# Altium PCB Co1n1oT.PcbDoc (part 3 of 3)
Units mil, origin at the board's own origin, x right, y up, seen from the top; angles counter-clockwise.
Board outline 3740.16 x 2559.06 mil, 4 copper layers (Top Layer, GroundPlane, PowerPlane, Bottom Layer), stack 58.4 mil thick; 129 components, 105 nets, 410 pads, 365 vias.
Unrouted connection lines stored in the file: 18.
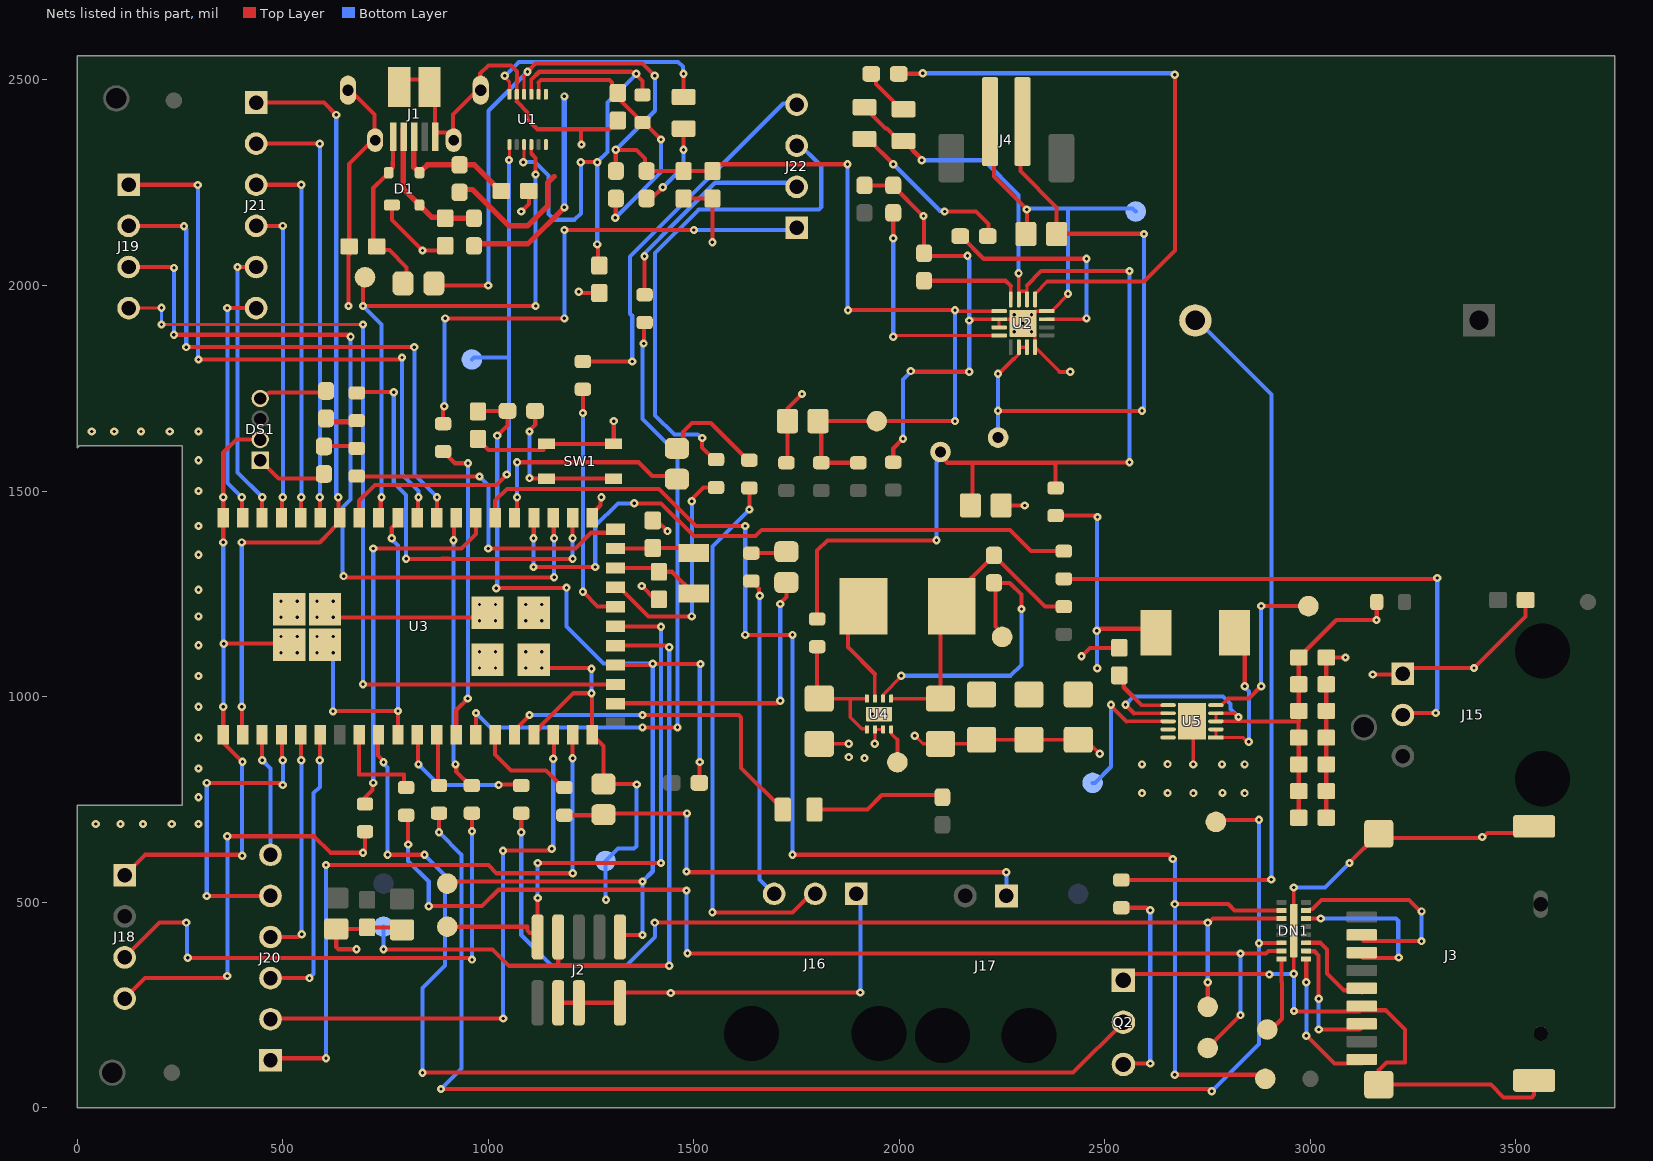
[diagram p4: the nets of this part, all layers, seen from the top]

## Via types
v1: diameter 20, hole 8, Top Layer to Bottom Layer, 350 vias
v2: diameter 19.68, hole 7.87, Top Layer to Bottom Layer, 13 vias
v3: diameter 20, hole 8, Top Layer to Bottom Layer, tented both sides, 2 vias

## Nets (pads, with @x,y where several pads share a name; then routed paths per layer and width w, separated by ;. In a path a pad name is that pad's centre, name@x,y a point inside that pad or via, vN(x,y) a via of type N, cw(c..) or ccw(c..) an arc to the next point about the centre after c; other vN are vias at no path point) (continued)
BQ_ILIM_6: R20.2 U2.12 | length 249.2
  Top Layer w8: U2.12@2270.94,1965.99 2270.94,1999.06
  Top Layer w10: R20.2@2060,2011.54 2258.46,2011.54 2270.94,1999.06
BQ_ISET_6: R21.1 U2.16 | length 560.4
  Top Layer w8: v1@1991.09,1878.47 U2.16@2242.48,1878.47
  Top Layer w10: v1(1985,1875) 1987.62,1875 v1@1991.09,1878.47 ; v1(1985,2115) R21.1@1985,2176.54
  Bottom Layer w10: v1(1985,1875) v1(1985,2115)
"BUZZER PWM-": Q2.2 U3.9 | length 2721.7
  Top Layer w10: U3.9@732.95,907.44 731.48,905.96 731.48,856.23 745,842.71 v1(745,840) ; v1(755,615) v1(844.53,615) ; v1(840,85) 2422.64,85 Q2.2@2545,207.36
  Bottom Layer w10: v1(745,840) 745,837.29 755,827.29 v1(755,615) ; v1(840,85) 840,290.73 895,345.73 895,564.37 844.53,614.84 v1(844.53,615)
CBUS0_5: D5.K U1.6 | length 576.4
  Top Layer w8: v1(1040,2510) 1040,2506.75 1051.34,2495.41 U1.6@1051.34,2465.08
  Top Layer w10: D5.K@1475,2458.59 v1(1475,2515)
  Bottom Layer w10: v1(1040,2510) 1074.06,2544.06 1461.63,2544.06 1473.09,2532.6 1473.09,2516.91 v1(1475,2515)
F1_3: J21.6 U3.50 | length 595.4
  Top Layer w10: v1(365,1945) J21.6@435,1945 ; v1(400,1485) 401.12,1483.88 401.12,1436.12 U3.50@402.24,1435
  Bottom Layer w10: v1(365,1945) 365,1520 v1(400,1485)
F2_3: J21.5 U3.49 | length 680.1
  Top Layer w10: v1(390,2045) J21.5@435,2045 ; U3.49@449.49,1435 449.74,1435.26 449.74,1484.74 v1(450,1485)
  Bottom Layer w10: v1(390,2045) 390,1545 v1(450,1485)
F3_3: J21.4 U3.48 | length 777.2
  Top Layer w10: J21.4@435,2145 v1(500,2145) ; U3.48@496.73,1435 498.37,1436.63 498.37,1483.37 v1(500,1485)
  Bottom Layer w10: v1(500,1485) 500,1614.14 ; 500,1613.31 v1(500,2145)
F4_3: J21.3 U3.47 | length 920.4
  Top Layer w10: J21.3@435,2245 v1(545,2245) ; U3.47@543.98,1435 544.49,1435.51 544.49,1484.49 v1(545,1485)
  Bottom Layer w10: v1(545,1485) v1(545,2245)
F5_3: J21.2 U3.46 | length 1065.5
  Top Layer w10: J21.2@435,2345 v1(590,2345) ; v1(590,1485) 590.61,1484.39 590.61,1435.61 U3.46@591.22,1435
  Bottom Layer w10: v1(590,1485) v1(590,2345)
F6_3: J21.1 U3.2 U3.45 | length 1928
  Top Layer w10: v1(400,975) 401.12,973.88 401.12,908.56 U3.2@402.24,907.44 ; v1(400,1375) 589.84,1375 620,1405.16 620,1406.69 638.46,1425.16 U3.45@638.46,1435 ; J21.1@435,2445 600,2445 v1(630,2415) ; U3.45@635,1435 v1(635,1485)
  Bottom Layer w10: v1(400,975) v1(400,1375) ; v1(630,2415) 630,1492.62 635,1487.62 v1(635,1485)
FF1_3: J20.6 U3.3 | length 301.7
  Top Layer w10: U3.3@449.49,907.44 449.74,907.18 449.74,845.26 v1(450,845)
  Bottom Layer w10: v1@449.47,844.47 v1(450,845) 470,825 J20.6@470,615
FF2_3: J20.5 U3.4 | length 740.9
  Top Layer w10: v1(315,515) J20.5@470,515 ; v1(315,790) 492.29,790 497.29,785 v1(500,785) ; U3.4@496.73,907.44 498.37,905.81 498.37,846.63 v1(500,845)
  Bottom Layer w10: v1(315,515) v1(315,790) ; v1(500,785) v1(500,845)
FF3_3: J20.4 U3.5 | length 565.3
  Top Layer w10: J20.4@470,415 536.49,415 543.35,421.86 v1(546.06,421.86) ; U3.5@543.98,907.44 544.49,906.93 544.49,845.51 v1(545,845)
  Bottom Layer w10: v1(545,845) 545,422.92 v1(546.06,421.86)
FF4_3: J20.3 U3.6 | length 688.8
  Top Layer w10: J20.3@470,315 v1(565,315) ; v1(590,845) 590.61,845.61 U3.6@590.61,898.21
  Bottom Layer w10: v1(565,315) 565,315.7 575,325.7 575,765 590,780 v1(590,845)
FF5_3: J20.2 U3.18 | length 1376.2
  Top Layer w10: J20.2@470,215 471.88,216.88 v1(1036.36,216.88) ; v1(1035.68,625) 1147.04,625 1151.86,629.82 v1(1154.48,629.82) ; U3.18@1158.15,907.44 1160,905.59 v1@1160,848.55
  Bottom Layer w10: v1(1035.68,625) 1035.68,217.56 v1(1036.36,216.88) ; v1(1154.48,629.82) 1157.93,633.26 v1(1157.93,848.55)
FF6_3: J20.1 U3.19 | length 1553.1
  Top Layer w10: J20.1@470,115 475,120 v1(605,120) ; v1(605,590) 1000,590 1020,570 v1(1205.12,570) ; v1(1205,850) 1205.2,850.2 1205.2,907.24 U3.19@1205.39,907.44
  Bottom Layer w10: v1(605,120) v1(605,590) ; v1@1205,570 v1(1205,850)
FLASH_MEM_SPI_C\S\: DN1.10 TP16.1 U3.37 | length 3560.3
  Top Layer w10: U3.37@1016.42,1435 1016.42,1476.42 1045,1505 1415,1505 1505,1415 v1(1625,1415) ; v1(1625,1150) v1(1740,1150) ; v1(1740,615) 2654.3,615 2664.3,605 v1(2665,605) ; v1(2670,80) 2880,80 TP16.1@2890,70 ; v1(2670,495) 2800,495 2815.32,479.69 DN1.10@2929.53,479.69
  Bottom Layer w10: v1(1625,1150) v1(1625,1415) ; v1(1740,615) v1(1740,1150) ; v1(2665,605) 2665,602.38 2670,597.38 v1(2670,495) v1(2670,80)
GND: C1.1 C2.1 C3.1 C4.1 C5.1 C6.1 C7.1 C8.1 C9.1 C10.1 C11.2 C12.1 C13.1 C14.1 C15.1 C16.1 C17.1 C18.1 C19.1 C20.1 C21.1 C22.1 C23.1 C24.1 C25.1 C26.1 C27.1 C28.1 C29.1 C31.1 D1.1 DN1.EP DS1.2 J1.5 J1.S1 J1.S2 J1.S3 J1.S4 J1.S5 J1.S6 J2.3 J2.5 J2.9 J3.6 J3.10 J3.11 J3.12 J3.13 J4.2 J15.1 J16.1 J18.1 JP10.1 JP11.2 Q2.1 R6.1 R15.2 R20.1 R21.2 SW1.1 SW1.2 TP3.1 TP7.1 U1.5 U1.13 U2.4 U2.8 U2.14 U2.15 U2.EP U3.1 U3.10 U3.17 U3.20 U3.32 U3.42 U3.51 U3.EP U4.2 U4.3 U4.9 U5.11 | length 13938.3
  Top Layer w8: 1069.21,2447.2 U1.5@1069.21,2464.88 ; U1.5@1069.21,2465.08 1069.21,2496.15 ; C8.1@1805,884.88 v1(1876.72,884.92) ; v1(1940,885) 1940.63,885.63 U4.2@1940.63,920 U4.3@1960.32,920 ; v1(2037.38,904.88) 2057.37,884.88 C9.1@2100,884.88 2190,884.88 C16.1@2200,894.88 C17.1@2315,894.88 C18.1@2435,894.88 2453.29,894.88 v1(2487.59,860.59) ; 2179.97,1918.13 U2.14@2228.46,1918.13 ; U2.15@2242.48,1898.15 U2.14@2242.48,1917.55 ; U2.14@2256.49,1917.86 U2.EP@2272.72,1917.86 ; v1(2300.47,1907.99) v1(2321.31,1887.16) 2330,1878.47 U2.4@2330,1850 2390.06,1789.94 ; U2.EP@2330,1937.52 U2.8@2358.47,1937.52 U2.8@2344.74,1937.52 ; U2.8@2372.48,1940.17 v1@2410,1977.68 ; U5.11@2711.81,939.68 2715,936.49 v1(2715,835) ; v1(1876.72,884.92) v1(1876.72,884.92)
  Top Layer w10: J18.1@115.28,565.28 165,615 398.76,615 v1(401.1,612.66) ; v1(355,975) U3.1@355,907.44 355,888.39 v1(402.15,841.23) ; v1(355,1375) U3.51@355,1435 v1(355,1485) 355,1593.05 386.95,1625 DS1.2@445,1625 ; v1(356.33,1128.62) U3.EP@513.25,1128.62 ; v1(622.27,963.88) 622.83,964.44 779.44,964.44 v1(780,965) 780.1,964.9 780.1,907.54 U3.10@780.2,907.44 ; v1(622.43,1192.63) U3.EP@970.16,1192.63 ; J1.S3@657.4,2493.19 657.4,2481.61 723.35,2415.67 723.35,2357.56 661.54,2295.75 C2.1@661.54,2095 661.54,2074.91 660,2073.37 v1(660,1950) ; v2(679.57,385.21) 635.86,385.21 630,391.07 C11.2@630,434.6 701.06,434.6 C15.1@705,438.54 776.06,438.54 C10.1@780,434.6 ; v1(765,1385) 765,1410.52 770.86,1416.38 771.42,1416.38 780.2,1425.16 U3.42@780.2,1435 ; D1.1@765.47,2195.63 765.47,2159.53 v1(840,2085) 883.46,2085 C5.1@895,2096.54 ; J1.S6@781.91,2501.06 855.73,2501.06 870,2486.79 870,2380 878.07,2371.93 914.29,2371.93 914.29,2415.67 980.24,2481.61 980.24,2515.24 1000,2535 1055,2535 1069.84,2520.16 1069.84,2496.78 1069.21,2496.15 ; C12.1@975,1626.54 975,1624.57 989.69,1609.88 990.12,1609.88 1000,1600 1134.09,1600 1134.09,1607.13 SW1.1@1141.61,1614.65 SW1.2@1305,1614.65 1305,1669.87 v1(1304.87,1670) ; 1069.21,2447.2 1095.71,2420.71 U1.13@1095.71,2403.98 1119.69,2380 1225,2380 ; v1(1080,2180) 1098.46,2198.46 C6.1@1098.46,2230 ; U3.17@1110.45,906.99 U3.17@1110.9,907.44 1124.68,921.22 1124.68,925.52 1207.25,1008.08 v1(1251.17,1008.08) 1251.9,1007.35 1251.9,908.17 U3.20@1252.64,907.44 1280,880.08 R15.2@1280,787.4 1359.84,787.4 v1(1361,786.24) ; v1(1130.03,1069.43) 1249.35,1069.43 v1(1251.17,1067.61) ; J2.3@1170,255 J2.5@1220,255 J2.9@1320,255 1320,270.61 1329.39,280 1442.67,280 v1(1444.01,278.66) ; v1(1220,1985) 1222.71,1985 1226.17,1981.54 C1.1@1270,1981.54 ; v1(1226.5,2342.8) 1225,2344.3 1225,2380 ; U3.32@1252.64,1435 1252.64,1444.84 1273.15,1465.35 1273.15,1483.15 v1(1275,1485) ; C7.1@1315,2401.54 1315,2399.57 1300.31,2384.88 1298.35,2384.88 1293.46,2380 1225,2380 ; v1(1373.39,1268.72) 1405.58,1236.54 C13.1@1415,1236.54 ; C14.1@1400,1428.46 1409.61,1428.46 v1(1435.63,1402.44) ; v1@1444.01,280 v1(1905,280) ; C24.1@1475,2211.54 C3.1@1545,2211.54 v1(1545,2105) ; JP10.1@1725,1568.75 1727.6,1571.35 C4.1@1727.6,1670 1727.6,1700.8 v1(1762.84,1736.04) ; v2@1875,855 1876.77,853.23 v2(1876.77,852.55) ; R6.1@1915,2243.46 R21.2@1985,2243.46 1985,2241.46 2057.51,2168.96 v1(2058.52,2168.96) ; JP11.2@1985,1570 1985,1603.46 v1(2008.87,1627.34) ; v1(2027.41,1791.65) 2029.06,1790 v1(2170,1790) ; v1@2060,2166.46 R20.1@2060,2078.46 2066.29,2072.18 v1(2165.78,2072.18) ; v1(2170,1915) 2171.85,1916.85 2178.7,1916.85 2179.97,1918.13 ; J4.2@2220.63,2398.58 2230,2389.21 2230,2265 v1(2310,2185) 2310,2127.4 C26.1@2307.6,2125 ; C25.1@2247.4,1465 C25.1@2252.4,1465 ; C25.1@2252.4,1470 2257.4,1465 v1(2305,1465) ; U2.EP@2272.72,1917.86 2279.64,1910.95 v1(2279.64,1887.16) ; v1(2300.47,1907.99) v1(2321.31,1928.83) U2.EP@2328.22,1935.74 ; v1(2321.31,1887.16) U2.EP@2328.22,1880.24 ; 2390.06,1789.94 v1(2415.45,1789.94) ; v1@2410,1977.68 v1(2410,1980) ; v1(2442.8,1097.83) 2463.44,1118.46 C19.1@2535,1118.46 ; Q2.1@2545,309.72 2560.28,325 2899.04,325 v1(2900.03,324.02) ; v2(2652.63,835.45) v2@2652.63,836.03 ; v2(2715,765) v2@2715,770 ; v2@2785.18,765.72 v2(2786.13,765.72) ; v1(2960,235) 2960.87,234.13 3119.09,234.13 3121.89,236.93 3183.07,236.93 3230,190 3230,109.69 3219.8,109.69 3219.49,110 3185,110 3166.22,91.22 J3.10@3166.22,56.1 3438.9,56.1 3470,25 3538.32,25 3544.17,30.86 J3.12@3544.17,65.94 ; C20.1@3038.46,705 C21.1@3038.46,770 C22.1@3038.46,835 C23.1@3038.46,900 C27.1@3038.46,965 C28.1@3038.46,1030 C29.1@3038.46,1095 v1(3085,1095) ; v1(3095,595) 3095,596.04 J3.11@3160.28,661.32 ; v1(3151.76,1053.73) 3223.46,1053.73 J15.1@3224.84,1055.12 3239.12,1069.4 v1(3398.05,1069.4) 3523.46,1194.81 C31.1@3523.46,1235 ; J3.11@3166.3,656.22 3415.57,656.22 v1(3417.7,658.35) 3420.32,658.35 3430.36,668.39 3528.5,668.39 J3.13@3544.17,684.06
  Bottom Layer w10: v1(355,975) 355.67,975.67 355.67,1127.95 v1(356.33,1128.62) 355,1129.95 v1(355,1375) ; v1(355,1485) v1@355,1487.5 ; v1(401.1,612.66) 401.1,840.19 v1(402.15,841.23) ; v1(622.27,963.88) 622.43,964.04 v1(622.43,1106.73) ; J1.S4@723.35,2353.35 J1.S4@723.35,2371.93 ; v1(765,1385) 765,1382.29 780,1367.29 v1(780,965) ; v1(1251.17,1008.08) v1(1251.17,1067.61) ; v1(1286.41,505.53) 1285,506.94 TP7.1@1285,600 1315,630 1354.14,630 1360,635.86 1360,785.24 v1(1361,786.24) ; J16.1@1895.12,520.16 1905,510.28 v1(1905,280) ; v1(2008.87,1627.34) 2008.87,1771.01 2027.41,1789.55 v1(2027.41,1791.65) ; v1(2165.78,2072.18) 2167.64,2070.33 2167.64,2063.84 2170,2061.48 v1(2170,1790) ; v1(2310,2185) 2311.91,2186.91 2318.98,2186.91 2319.54,2187.47 2411.01,2187.47 ; v1(2410,1980) 2410,2186.46 2411.01,2187.47 ; TP3.1@2575,2180 2567.53,2187.47 2411.01,2187.47 ; v1(2900.03,324.02) 2900.75,324.75 2958.72,324.75 v3(2959.45,325.47) 2959.72,325.2 2959.72,235.28 v1(2960,235) ; v3(2959.45,535.47) 3035.47,535.47 v1(3095,595) ; v1@3397.59,1069.86 v1(3398.05,1069.4)
  other v1: 45,690 105,690 160,690 230,690 295,690 295,755 295,825 295,900 1934.72,957.4 1966.22,957.4 295,975 295,1050 978.26,1069.43 1017.63,1069.43 1090.66,1069.43 495.76,1106.73 535.13,1106.73 583.06,1106.73 978.26,1108.81 1017.63,1108.81 1090.66,1108.81 1130.03,1108.81 295,1125 495.76,1146.11 535.13,1146.11 583.06,1146.11 622.43,1146.11 978.26,1184.54 1017.63,1184.54 1090.66,1184.54 1130.03,1184.54 495.76,1192.63 535.13,1192.63 583.06,1192.63 295,1195 978.26,1223.91 1017.63,1223.91 1090.66,1223.91 1130.03,1223.91 495.76,1232.01 535.13,1232.01 583.06,1232.01 622.43,1232.01 295,1260 295,1345 295,1415 295,1500 295,1575 35,1645 90,1645 155,1645 225,1645 295,1645 2279.64,1928.83
  other v2: 2590,765 2652.63,765.4 2840,765 2590,835 2785,835 2840,835 1915,850
GREEN_LED_1: R13.1 U3.36 | length 543.6
  Top Layer w10: U3.36@1063.66,1435 1070,1441.34 v1(1070,1485) ; v1(1070,1570) 1365,1570 1398.73,1536.27 1451.51,1536.27 R13.1@1458.94,1528.85
  Bottom Layer w10: v1(1070,1485) v1(1070,1570)
GREEN_LED_2: R14.1 U3.22 | length 697.7
  Top Layer w10: U3.22@1309.38,982.09 1310.83,983.55 1700.93,983.55 1707.38,990 v1(1710,990) ; v1(1710,1225) 1710,1227.62 1725,1242.62 R14.1@1725,1277.6
  Bottom Layer w10: v1(1710,990) v1(1710,1225)
"I2C_0(SCL) LIGHT SENSOR": JP20.1 U3.39 | length 675.1
  Top Layer w10: v1(915,1380) 916.85,1381.85 916.85,1429.92 U3.39@921.93,1435 ; v1(920,835) 921.85,833.15 921.85,817.9 956,783.75 JP20.1@960,783.75
  Bottom Layer w10: v1(915,1380) 915,842.62 920,837.62 v1(920,835)
"I2C_0(SDA) LIGHT SENSOR": JP21.1 U3.38 | length 937.4
  Top Layer w10: JP21.1@687.25,741 692.5,746.25 693.96,747.71 693.96,748.71 718.15,772.9 718.15,788.15 v1(720,790) ; v1(720,1360) 935,1360 970,1395 970,1434.17 U3.38@969.17,1435
  Bottom Layer w10: v1(720,790) v1(720,1360)
IN: C16.2 C17.2 C18.2 JP12.2 L2.1 U5.9 U5.10 | length 623
  Top Layer w10: JP12.2@2380,1440 2475.71,1440 2479.18,1436.52 v1(2481.89,1436.52) ; v1(2480,1160) 2482.71,1160 2487.71,1165 2614.51,1165 L2.1@2624.51,1155
  Bottom Layer w10: v1(2481.22,1068.86) 2480.61,1069.47 2480.61,1159.39 v1(2480,1160) 2480.94,1160.94 2480.94,1435.58 v1(2481.89,1436.52)
LCD_C\S\: J22.1 JP27.2 | length 1334.5
  Top Layer w10: JP27.2@890,1663.75 890,1703.88 v1(892.53,1706.42) ; v1(895,1920) v1(1185,1920) ; v1(1185,2135) v1(1500,2135)
  Bottom Layer w10: v1(892.53,1706.42) 893.77,1707.65 893.77,1918.77 v1(895,1920) ; v1(1185,1920) v1(1185,2135) ; v1(1500,2135) 1735,2135 J22.1@1750,2150
LCD_CLK: J22.2 JP26.2 | length 539.9
  Top Layer w10: v1(1379.79,2070.89) 1380,2070.69 JP26.2@1380,1977.5
  Bottom Layer w10: v1@1376.31,2074.37 1459.43,2157.49 1551.94,2250 J22.2@1750,2250
LCD_MISO: J22.3 JP25.2 | length 1235.7
  Top Layer w10: v1(1520.21,1629.15) 1520.21,1605.97 1549.94,1576.25 JP25.2@1553.94,1576.25
  Bottom Layer w10: v1(1520.21,1629.15) 1517.68,1629.15 1509.51,1637.31 1452.58,1637.31 1405.84,1684.06 1405.84,2078.9 1511.94,2185 1804.14,2185 1810,2190.86 1810,2290 J22.3@1750,2350
LCD_MOSI: J22.4 JP24.2 | length 939.5
  Top Layer w10: JP24.2@1230,1815 v1(1350,1815)
  Bottom Layer w10: v1(1350,1815) 1350,1926.31 1345,1931.31 1345,2070 1717.43,2442.43 1742.43,2442.43 J22.4@1750,2450
LCD_SPI1_C\S\: JP27.1 U3.13 | length 744.6
  Top Layer w10: JP27.1@890,1596.25 918.68,1567.57 v1(950.71,1567.57) ; U3.13@921.93,907.44 921.93,966.93 v1(950,995)
  Bottom Layer w10: v1(950,995) 950.35,995.35 950.35,1567.22 v1(950.71,1567.57)
LCD_SPI1_CLK: JP26.1 U3.14 | length 1579.7
  Top Layer w10: U3.14@969.17,907.44 969.59,907.85 969.59,959.59 v1(970,960) ; v1(1375,925) v1(1460,925) ; v1(1377.74,1858.62) 1378.87,1859.75 1378.87,1908.87 JP26.1@1380,1910
  Bottom Layer w10: v1(970,960) 1005,925 v1(1375,925) ; v1(1377.74,1858.62) 1375,1855.88 1375,1675 1460,1590 v1(1460,925)
LCD_SPI1_MISO: JP25.1 U3.28 | length 570.7
  Top Layer w10: U3.28@1309.38,1265.56 1319.22,1265.56 1389.78,1195 v1(1495,1195) ; v1(1495,1475) 1496.85,1476.85 1496.85,1481.85 1523.75,1508.75 JP25.1@1553.94,1508.75
  Bottom Layer w10: v1(1495,1195) v1(1495,1475)
LCD_SPI1_MOSI: JP24.1 U3.27 | length 587.1
  Top Layer w10: v1(1230,1255) 1265.84,1219.16 1308.53,1219.16 U3.27@1309.38,1218.31 ; v1(1230,1690) JP24.1@1230,1747.5
  Bottom Layer w10: v1(1230,1255) v1(1230,1690)
LOCK_SIGNAL_SWITCH: JP19.1 U3.15 | length 250.5
  Top Layer w10: U3.15@1016.42,907.44 1016.42,858.58 1055,820 1139.75,820 1181,778.75 JP19.1@1185,778.75
M\C\U\_\R\E\S\E\T\_3: C12.2 J2.10 R11.1 R12.2 TP10.1 U3.24 | length 2760.3
  Top Layer w10: TP10.1@900,545 905,550 v1(1375,550) ; v1(1018.97,1263.3) 1019.82,1264.15 1189.15,1264.15 v1(1190,1265) ; v1(1021.74,1634.73) 1046.54,1659.52 R12.2@1046.54,1695 989.69,1695 986.54,1698.15 C12.2@986.54,1703.15 ; U3.24@1309.38,1076.58 1393.96,1076.58 1397.38,1080 v1(1400,1080) 1400.54,1079.46 1515.58,1079.46 v1(1516.13,1078.91) ; J2.10@1320,415 1325,420 v1(1375,420) ; R11.1@1513.46,790 1513.46,839.96 v1(1514.36,840.86) ; C12.2@986.54,1703.15 976.85,1693.46 C12.2@975,1693.46 986.54,1705 C12.2@986.54,1703.15
  Bottom Layer w10: v1(1018.97,1263.3) 1021.74,1266.07 v1(1021.74,1634.73) ; v1(1190,1265) 1190,1170 1280,1080 v1(1400,1080) 1400,575 v1(1375,550) v1(1375,420) ; v1(1514.36,840.86) 1514.36,1077.15 v1(1516.13,1078.91)
MCU_LED: D8.K U3.16 | length 846.2
  Top Layer w10: U3.16@1063.66,907.44 1063.66,917.28 1100,953.62 v1(1100,955) ; v1(1375,955) 1609.14,955 1615,949.14 1615,826.41 D8.K@1716.41,725
  Bottom Layer w10: v1(1100,955) v1(1375,955)
MCU_RxI_UART_CLI_1: TP2.1 U1.7 U3.44 | length 1324.6
  Top Layer w8: v1@1051.34,2306.34 U1.7@1051.34,2342.87
  Top Layer w10: U3.44@685.71,1435 685.71,1476.33 724.11,1514.73 1019.73,1514.73 v1(1045,1540) ; v1(1050,2305) v1@1051.34,2306.34
  Bottom Layer w10: TP2.1@960,1820 965,1825 1050,1825 ; v1(1045,1540) 1045,1542.62 1050,1547.62 1050,1825 ; v1(1050,2305) 1050,1825
MCU_TxO_UART_CLI_1: TP4.1 U1.10 U3.43 | length 1428.5
  Top Layer w8: 1104.57,2320.43 U1.10@1104.57,2342.95
  Top Layer w10: TP4.1@700,2020 695,2015 695,1948.15 696.85,1950 v1(1115,1950) ; U3.43@732.95,1435 738.15,1440.19 738.15,1483.15 v1(740,1485) ; 1104.57,2320.43 1115,2310 v1(1115,2270)
  Bottom Layer w10: v1(695,1950) 740,1905 v1(740,1485) ; v1(1115,1950) v1(1115,2270)
MEM_SPI_CIPO: DN1.15 JP3.2 TP14.1 | length 2758.9
  Top Layer w10: v1(805,640) JP3.2@805,719 ; v1(855,490) 985,490 1025,530 1480.15,530 v1(1482.15,528) ; v1@1484.28,375 1484.43,375.15 2829.85,375.15 v1(2830,375) 2891.74,375 2898,381.26 DN1.15@2929.53,381.26 ; TP14.1@2750,145 v1(2830,225)
  Bottom Layer w10: v1(805,640) 805,600 855,550 v1(855,490) ; v1(1482.15,528) 1482.15,377.44 v1(1484.28,375.31) ; v1(2830,225) v1(2830,375)
MEM_SPI_CLK: DN1.14 JP4.2 TP15.1 | length 3461.4
  Top Layer w10: v1(880,670) JP4.2@880,716.25 ; v1(885,45) 2752.38,45 2757.38,40 v1(2760,40) ; TP15.1@2770,695 2775,700 v1(2875,700) ; v1(2875,400) 2875.47,400.47 2929.06,400.47 DN1.14@2929.53,400.94
  Bottom Layer w10: v1(880,670) 935,615 935,95 v1(885,45) ; v1(2760,40) 2875,155 v1(2875,400) v1(2875,700)
MEM_SPI_COPI: DN1.11 JP2.2 TP13.1 | length 2449.7
  Top Layer w10: v1(1080,670) JP2.2@1080,716.25 ; v1(1405,450) 2752.62,450 2762.62,460 DN1.11@2929.53,460 ; TP13.1@2750,245 v1(2750,305)
  Bottom Layer w10: v1(1080,670) 1080,420 1155,345 1334.47,345 1405,415.53 v1(1405,450) ; v1(2750,305) v1(2750,450)
"MOTOR PWM+": JP14.1 U3.35 | length 1593.6
  Top Layer w10: v1(1110,1315) v1(1260,1315) ; v1(1110,1385) 1110.45,1385.45 1110.45,1434.55 U3.35@1110.91,1435 ; v1(1355,1470) 1420,1470 1499.88,1390.12 1650.12,1390.12 1665,1405 2268.75,1405 2320,1353.75 JP14.1@2400,1353.75
  Bottom Layer w10: v1(1110,1315) v1(1110,1385) ; v1(1260,1315) 1260,1415 1315,1470 v1(1355,1470)
NetC19_2: C19.2 U5.6 | length 159.3
  Top Layer w8: 2589.23,979.06 U5.6@2653.62,979.06
  Top Layer w10: C19.2@2535,1051.54 2545.71,1040.83 2545.71,1022.58 2589.23,979.06
NetD3_K: D3.K R18.2 | length 124.2
  Top Layer w10: R18.2@1931.54,2515 1943.46,2503.08 1943.46,2490.42 1986.06,2447.81 1986.06,2443.47 2000.94,2428.59 D3.K@2010,2428.59
NetD4_K: D4.K R19.2 | length 417.8
  Top Layer w10: D4.K@1915,2356.41 1924.06,2356.41 1985,2295.47 v1(1985,2295) ; v1(2110,2180) 2186.46,2180 2216.46,2150 2216.46,2121.46 R19.2@2215,2120
  Bottom Layer w10: v1(1985,2295) 2098.09,2181.91 2108.09,2181.91 v1(2110,2180)
NetD5_A: D5.A R3.2 | length 214.2
  Top Layer w10: R3.2@1385,2211.54 1397.07,2211.54 v1(1424.43,2238.9) ; v1(1475,2330) D5.A@1475,2381.42
  Bottom Layer w10: v1(1424.43,2238.9) 1475,2289.47 v1(1475,2330)
NetD8_A: D8.A R7.1 | length 335
  Top Layer w10: D8.A@1793.58,725 1921.99,725 1956.99,760 R7.1@2114.04,760
NetDN1_1: DN1.1 J3.9 | length 350
  Top Layer w10: DN1.1@2989.37,361.57 2989.68,361.26 2989.68,305.31 v1(2990,305) ; v1(2990,175) 3057.99,107.01 J3.9@3124.96,107.01
  Bottom Layer w10: v1(2990,175) v1(2990,305)
NetDN1_2: DN1.2 J3.7 | length 321.8
  Top Layer w10: DN1.2@2989.37,381.26 2990.28,380.35 3009.65,380.35 3020,370 v1(3020,265) ; v1(3020,190) 3119.94,189.98 3123.58,193.62 J3.7@3124.96,193.62
  Bottom Layer w10: v1(3020,190) v1(3020,265)
NetDN1_3: DN1.3 J3.5 | length 219.8
  Top Layer w10: DN1.3@2989.37,400.94 3024.06,400.94 3040,385 3040,326.55 3081.2,285.35 3119.84,285.35 J3.5@3124.96,280.24
NetDN1_6: DN1.6 J3.3 | length 407.9
  Top Layer w10: DN1.6@2989.37,460 v1(3025,460) ; J3.3@3124.96,366.85 3127.72,364.09 3214.09,364.09 v1(3215,365)
  Bottom Layer w10: v1(3025,460) 3207.68,460 3213.53,454.14 3213.53,366.47 v1(3215,365)
NetDN1_7: DN1.7 J3.2 | length 522.6
  Top Layer w10: DN1.7@2989.37,479.69 2995.87,479.69 2999.65,483.46 3005.22,483.46 3026.76,505 3240.12,505 3267.76,477.37 v1(3270.38,477.37) ; J3.2@3124.96,410.16 3129.37,405.75 3269.25,405.75 v1(3270,405)
  Bottom Layer w10: v1(3270,405) 3270.38,405.38 v1(3270.38,477.37)
NetDS1_1: DS1.1 R8.1 | length 178.4
  Top Layer w10: DS1.1@445,1575 490,1530 588.46,1530 R8.1@600,1541.54
NetDS1_4: DS1.4 R9.1 | length 167.6
  Top Layer w10: DS1.4@445,1725 451.92,1725 466.92,1740 601.54,1740 R9.1@605,1743.46
NetJ15_2: J15.2 JP14.2 | length 1321.4
  Top Layer w10: JP14.2@2400,1286.25 3303.52,1286.25 3305.69,1288.42 v1(3308.31,1288.42) ; J15.2@3224.84,955.12 3230,960.28 3304.72,960.28 v1(3305,960)
  Bottom Layer w10: v1(3305,960) 3306.91,961.91 3306.91,968.98 3308.31,970.38 v1(3308.31,1288.42)
NetJ16_2: J16.2 JP15.2 | length 1338.6
  Top Layer w10: v1(1545,475) 1740,475 1785.16,520.16 J16.2@1795.12,520.16 ; v1(1635,1455) JP15.2@1635,1507.5
  Bottom Layer w10: v1(1545,475) 1545,1365 v1(1635,1455)
NetJ16_3: J16.3 JP16.2 | length 785.3
  Top Layer w10: JP16.2@1640,1281.25 1642.38,1281.25 1653.15,1270.48 1653.15,1268.1 1658.15,1263.1 1658.15,1246.85 v1(1660,1245)
  Bottom Layer w10: v1(1660,1245) 1660,555.28 J16.3@1695.12,520.16
NetJ17_1: J17.1 JP19.2 R15.1 | length 1278.5
  Top Layer w10: JP19.2@1185,711.25 1278.65,711.25 R15.1@1280,712.6 1283.19,715.79 v1(1483.18,715.79) ; v1(1481.86,574.57) 1483.83,572.6 v1(2260.17,572.6) v1@2260.12,572.55
  Bottom Layer w10: v1(1481.86,574.57) 1481.86,714.47 v1(1483.18,715.79) ; J17.1@2260.12,515.16 2260.17,515.21 v1(2260.17,572.6)
NetJ18_3: J18.3 JP20.2 | length 1321.7
  Top Layer w10: J18.3@115.28,365.28 200,450 v1(265,450) ; v1(268.48,364.39) 952.99,364.39 957.38,360 v1(960,360) ; JP20.2@960,716.25 960,672.48 v1(960.34,672.15)
  Bottom Layer w10: v1(265,450) 266.74,448.26 266.74,366.13 v1(268.48,364.39) ; v1(960,360) 960.17,360.17 960.17,671.98 v1(960.34,672.15)
NetJ18_4: J18.4 JP21.2 | length 1002.5
  Top Layer w10: J18.4@115.28,265.28 165,315 v1@357.29,315 ; v1(365,660) 576.35,660 616.24,620.11 694.89,620.11 v1(695,620) 695,622.62 700,627.62 JP21.2@700,671.25
  Bottom Layer w10: v1(365,320) v1(365,660)
NetJP13_1: JP13.1 Q2.3 | length 511.9
  Top Layer w10: JP13.1@2540,486.25 2601.37,486.25 2607.62,480 v1(2610.33,480) ; Q2.3@2545,105 2547.36,107.36 v1(2610.33,107.36)
  Bottom Layer w10: v1(2610.33,107.36) v1(2610.33,480)
NetJP13_2: JP13.2 LS1.2 | length 1799
  Top Layer w10: JP13.2@2540,553.75 2903.47,553.75 v1(2904.72,555)
  Bottom Layer w10: LS1.2@2719.92,1915 2725,1915 2905,1735 v1@2905,560.86
NetJP15_1: JP15.1 R13.2 | length 253.6
  Top Layer w10: R13.2@1458.94,1603.65 1474.24,1618.96 1474.24,1644.24 1495,1665 1541,1665 1631,1575 JP15.1@1635,1575
NetJP16_1: JP16.1 R14.2 | length 86.5
  Top Layer w10: JP16.1@1640,1348.75 1721.35,1348.75 R14.2@1725,1352.4
NetL1_1: L1.1 U4.7 | length 267.1
  Top Layer w8: U4.7@1940,995.43 1940,1055
  Top Layer w10: L1.1@1912.72,1220 1875,1182.28 1875,1120 1940,1055
NetL2_2: L2.2 U5.1 U5.2 | length 383.2
  Top Layer w8: U5.1@2770,900.31 U5.2@2770,920 ; U5.1@2770.16,900.16 2770.31,900.31 2836.44,900.31 2846.75,890 v1(2850,890)
  Top Layer w10: L2.2@2815.49,1155 2840,1130.49 v1(2840,1025)
  Bottom Layer w10: v1(2840,1025) 2840,1022.29 2850,1012.29 v1(2850,890)
NetR12_1: R12.1 SW1.3 SW1.4 | length 375.4
  Top Layer w10: v1(1100.01,1531.34) 1101.35,1530 SW1.4@1305,1530 ; v1(1100,1645) 1100,1647.71 1114.23,1661.94 1114.23,1694.23 R12.1@1113.46,1695
  Bottom Layer w10: v1(1100.01,1531.34) v1(1100,1645)
NetR18_1: R18.1 U2.9 | length 1498.8
  Top Layer w8: U2.9@2330,1965.99 2330,1980 2360,2010
  Top Layer w10: R18.1@1998.46,2515 2055.77,2515 v1(2056.99,2516.22) ; 2360,2010 2595,2010 2670.09,2085.09 v1(2670.09,2512.59)
  Bottom Layer w10: v1(2056.99,2516.22) 2666.45,2516.22 v1(2670.09,2512.59)
NetR19_1: R19.1 U2.7 | length 572.1
  Top Layer w8: U2.7@2358.47,1917.84 2377.68,1917.84 2452.84,1917.84 v1(2455,1920)
  Top Layer w10: R19.1@2148.07,2120 2150.07,2120 2205.07,2065 v1(2455,2065)
  Bottom Layer w10: v1(2455,1920) v1(2455,2065)
OUT: C9.2 JP22.1 L1.2 R4.1 U4.5 | length 744
  Top Layer w8: U4.5@1980,994.8 C9.2@2099.68,994.8
  Top Layer w10: C9.2@2099.68,994.8 C9.2@2100,995.12 2100,1192.72 L1.2@2127.28,1220 2127.28,1240.75 R4.1@2230,1343.46 2354.71,1218.75 JP22.1@2400,1218.75
RS_5: C7.2 JP7.2 R5.2 U1.2 | length 686.8
  Top Layer w8: U1.2@1122.36,2465.08 1122.36,2494.14
  Top Layer w10: 1122.36,2494.14 1128.22,2500 1295.15,2500 1301.01,2494.14 1301.01,2482.46 C7.2@1315,2468.46 1315,2456.25 JP7.2@1375,2396.25 1378.75,2396.25 v1(1420,2355) ; v1(1308.89,2164.71) 1310,2165.82 R5.2@1310,2211.54
  Bottom Layer w10: v1(1308.89,2164.71) 1420,2275.82 v1(1420,2355)
SD_CARD_DETECT_2: DN1.16 TP12.1 | length 191.9
  Top Layer w10: TP12.1@2895,190 2904.15,190 2930.36,216.21 2930.36,304.64 2929.76,305.24 2929.76,361.34 DN1.16@2929.53,361.57
SERCOM1_PAD2_SPI_CIPO: JP3.1 U3.8 | length 231.7
  Top Layer w10: U3.8@685.71,907.44 685,906.73 685,810 795,810 JP3.1@795,786
SERCOM1_PAD2_SPI_COPI: JP2.1 U3.11 | length 340.6
  Top Layer w10: U3.11@827.44,907.44 828.72,906.16 828.72,836.28 v1(830,835) ; v1(1025,785) 1026,786 1065.23,786 1067.48,783.75 JP2.1@1075,783.75
  Bottom Layer w10: v1(830,835) 880,785 v1(1025,785)
SERCOM1_PAD3_SPI_SCK: JP4.1 U3.12 | length 125.9
  Top Layer w10: U3.12@874.68,907.44 877.34,904.78 877.34,786.41 JP4.1@880,783.75
"SPARE 1": J19.1 U3.41 | length 1498.1
  Top Layer w10: J19.1@125,2245 292.21,2245 v1(292.97,2244.24) ; v1(295,1820) 782.38,1820 787.38,1825 v1(790,1825) ; U3.41@827.44,1435 828.72,1436.28 828.72,1483.72 v1(830,1485)
  Bottom Layer w10: v1(292.97,2244.24) 293.99,2243.22 293.99,1821.01 v1(295,1820) ; v1(790,1825) 790,1540 829.93,1500.07 829.93,1485.07 v1(830,1485)
"SPARE 2": J19.2 U3.40 | length 1423.4
  Top Layer w10: J19.2@125,2145 258.7,2145 v1(259.41,2144.29) ; v1(265,1850) v1(820,1850) ; U3.40@874.69,1435 874.84,1435.16 874.84,1484.84 v1(875,1485)
  Bottom Layer w10: v1@260,2143.7 260,2140.99 265,2135.99 v1(265,1850) ; v1(820,1850) 820,1540 v1(875,1485)
"SPARE 3": J19.3 U3.34 | length 1961.3
  Top Layer w10: J19.3@125,2045 233.39,2045 v1(235.54,2042.85) ; v1(235,1880) 657.38,1880 662.38,1875 v1(665,1875) ; v1@645,1295.86 650.86,1290 v1(1160,1290) ; U3.34@1158.15,1435 1159.07,1434.07 1159.07,1385.93 v1(1160,1385)
  Bottom Layer w10: v1(235,1880) 235.54,1880.54 v1(235.54,2042.85) ; v1(647.93,1292.93) 646.08,1294.78 646.08,1301.63 645,1302.71 645,1459.64 665,1479.64 v1(665,1875) ; v1(1160,1290) v1(1160,1385)
"SPARE 4": J19.4 U3.23 | length 2100.9
  Top Layer w7.87: J19.4@125,1945 204.07,1945 v1(204.96,1945.88) ; v1(205,1905) v1(695,1905)
  Top Layer w10: v1(695,1030) 695.33,1029.67 1309.05,1029.67 U3.23@1309.38,1029.34
  Bottom Layer w7.87: v1(204.96,1945.88) 205,1945.84 v1(205,1905)
  Bottom Layer w10: v1(695,1030) v1(695,1905)
"STATUS RGB PIN_1": JP17.1 U3.31 | length 807.7
  Top Layer w10: JP17.1@683.84,1535.36 978.17,1535.36 v1(978.46,1535.07) ; v1(1000,1360) 1211.56,1360 1250.07,1398.51 1300.6,1398.51 U3.31@1309.38,1407.29
  Bottom Layer w10: v1(978.46,1535.07) 1000,1513.53 v1(1000,1360)
"STATUS RGB PIN_2": JP18.1 U3.33 | length 1024.8
  Top Layer w10: JP18.1@669.93,1745 673.93,1741 769,1741 v1(770,1740) ; v1(800,1335) 887.13,1335 887.24,1335.11 903.81,1335.11 903.92,1335 v1(1205,1335) ; v1(1205,1385) 1205.2,1385.2 1205.2,1434.8 U3.33@1205.39,1435
  Bottom Layer w10: v1(770,1740) 770,1520 799.84,1490.16 799.84,1335.16 v1(800,1335) ; v1(1205,1335) v1(1205,1385)
STATUS_RGB_GREEN: JP18.2 R9.2 | length 86.6
  Top Layer w13.15: R9.2@605,1676.54 612.64,1668.89 666.68,1668.89 669.04,1671.25 JP18.2@680,1671.25 JP18.2@680,1678.75
STATUS_RGB_RED: JP17.2 R8.2 | length 80.3
  Top Layer w10: R8.2@600,1608.46 600.77,1609.23 JP17.2@680,1609.23
SWCLK: J2.4 TP9.1 U3.25 | length 1743.8
  Top Layer w10: v1(745,385) 1010,385 1050,345 1170,345 ; J2.4@1170,415 1170,345 ; U3.25@1309.38,1123.83 1433.55,1123.83 1437.38,1120 v1(1440,1120) ; v1(1440,345) 1170,345
  Bottom Layer w10: v1(745,385) TP9.1@745,440 ; v1(1440,345) v1(1440,1120)
SWDIO: J2.2 TP8.1 U3.26 | length 1385.1
  Top Layer w10: TP8.1@900,440 1095,440 1095,430.86 1100.86,425 1115.68,425 1120,429.32 v1(1120,510) ; v1(1120,595) v1(1420,595) ; U3.26@1309.38,1171.07 1309.91,1170.54 1419.46,1170.54 v1(1420,1170)
  Bottom Layer w10: v1(1120,510) v1(1120,595) ; v1(1420,595) v1(1420,1170)
USB_DATA_N: C5.2 D1.2 J1.2 R1.1 | length 347.7
  Top Layer w13.15: J1.2@793.23,2380 793.23,2234.8 D1.2@832.4,2195.63 832.4,2193.66 837.64,2188.43 839.6,2188.43 861.74,2166.29 892.17,2166.29 C5.2@895,2163.46 R1.1@965,2163.46
USB_DATA_P: C6.2 D1.3 J1.3 R2.1 | length 345.7
  Top Layer w13.15: J1.3@818.82,2380 818.82,2287.95 D1.3@832.4,2274.37 832.4,2276.34 837.64,2281.57 839.6,2281.57 851.5,2293.46 966.1,2293.46 1029.57,2230 C6.2@1031.54,2230
USB_FTDI_DATA_5_N: R1.2 U1.1 | length 528.7
  Top Layer w13.15: R1.2@965,2096.54 970,2101.54 1096.54,2101.54 v1(1185,2190)
  Bottom Layer w13.15: v1(1185,2190) v1(1185,2460)
USB_FTDI_DATA_5_P: R2.2 U1.12 | length 349.2
  Top Layer w13.15: R2.2@930,2235 931.52,2233.48 961.52,2233.48 1050,2145 1095,2145 1145,2195 1145,2250 1160,2265
VBAT: C26.2 J4.1 TP5.1 U2.2 U2.3 | length 1567.3
  Top Layer w8: 2278.42,1820.98 2290.63,1833.2 U2.2@2290.63,1850 U2.3@2310.31,1850
  Top Layer w10: v1(2240,1785) 2241.43,1785 2277.41,1820.98 2278.42,1820.98 ; v1@2242.99,1696.63 2244.62,1695 v1(2590,1695) ; J4.1@2299.37,2398.58 2294.37,2393.58 2294.37,2278.03 2382.4,2190 C26.2@2382.4,2125 2383.34,2125.93 2594.07,2125.93 v1(2595,2125)
  Bottom Layer w10: TP5.1@2240,1630 v1(2240,1785) ; v1(2590,1695) 2590,1697.71 2595,1702.71 v1(2595,2125)
  other v1: 2240,1695
VBOHYS: TP20.1 U5.8 | length 369
  Top Layer w8: 2552.61,939.68 U5.8@2653.62,939.68
  Top Layer w10: v1(2515,980) 2515,977.29 2552.61,939.68
  Bottom Layer w10: TP20.1@2470,790 2475.84,790 2515,829.16 v1(2515,980)
VBOPG: TP22.1 U5.5 | length 439
  Top Layer w8: U5.5@2770,979.06 2783.53,979.06 2799.48,995
  Top Layer w10: 2799.48,995 2850,995 v1(2880,1025) ; v1(2880,1220) TP22.1@2995,1220
  Bottom Layer w10: v1(2880,1025) v1(2880,1220)
VBUFB: TP21.1 U4.4 | length 86.2
  Top Layer w8: U4.4@1980,920 1980,910 1995,895
  Top Layer w10: TP21.1@1995,840 1995,895
VBUPG: R4.2 TP19.1 U4.6 | length 769
  Top Layer w8: U4.6@1960.32,994.8 1960.32,1004.65 v1@2004.75,1049.08
  Top Layer w10: v1@2004.75,1049.08 v1(2004.75,1050.69) ; TP19.1@2250,1145 2250,1154.35 2233.49,1170.86 2233.49,1276.54 R4.2@2230,1276.54 2268.46,1276.54 2296.89,1248.11 v1(2296.89,1213.13)
  Bottom Layer w10: v1(2004.75,1050.69) 2270.69,1050.69 2296.89,1076.89 v1(2296.89,1213.13)
VBUS: C2.2 D1.4 FB1.1 J1.1 | length 449
  Top Layer w10: J1.1@767.64,2380 767.64,2301.01 767.36,2300.73 767.36,2286.59 757.6,2276.83 757.6,2272.89 750.86,2266.15 749.38,2266.15 720,2236.77 720,2103.46 737.53,2085.93 759.07,2085.93 801.33,2043.67 801.33,2022.25 805.59,2017.99 FB1.1@792.6,2005
VCCIO: C1.2 JP7.1 U1.3 U1.9 | length 1334
  Top Layer w8: v1@1086.77,2301.77 U1.9@1086.77,2342.83 ; U1.3@1104.65,2465.08 1104.65,2500.86
  Top Layer w10: v1(1085,2300) v1@1086.77,2301.77 ; 1104.65,2500.86 1123.79,2520 1347.75,2520 1352.75,2515 v1(1360,2515) 1360,2512.29 1375,2497.29 JP7.1@1375,2463.75 ; v1(1225,2300) v1(1265,2300) ; v1(1265,2100) 1266.85,2098.15 1266.85,2051.61 C1.2@1270,2048.46
  Bottom Layer w10: v1(1085,2300) 1113.28,2300 1145.96,2267.33 1145.96,2174.04 1160,2160 1210,2160 1225,2175 v1(1225,2300) ; v1(1265,2100) v1(1265,2300) 1290,2325 1290,2445 v1(1360,2515)
Vin: C8.2 JP1.2 U4.1 U4.8 | length 342.5
  Top Layer w8: C8.2@1805.32,994.8 1880,994.8 ; U4.1@1920.94,920 1920.94,920.37 1920.02,921.29 1908.71,921.29 1880.12,949.88 1880.12,994.8 U4.8@1920.94,994.8
  Top Layer w10: JP1.2@1800,1121.25 1800,1000.12 C8.2@1805,995.12 C8.2@1805.32,994.8
Vout: C20.2 C21.2 C22.2 C23.2 C27.2 C28.2 C29.2 JP23.1 U5.3 U5.4 U5.7 | length 1364.1
  Top Layer w8: 2570.63,959.37 U5.7@2653.62,959.37 ; v1(2825,950) 2815.63,959.37 U5.4@2770,959.37 U5.3@2770,939.68 2852.26,939.68
  Top Layer w10: v1(2550,980) 2570.63,959.37 ; 2852.26,939.68 2852.36,939.58 ; 2852.36,939.68 2971.22,939.68 2971.22,900.32 C23.2@2971.54,900 C22.2@2971.54,835 C21.2@2971.54,770 C20.2@2971.54,705 ; 2971.54,939.68 C27.2@2971.54,965 C28.2@2971.54,1030 C29.2@2971.54,1095 3062.73,1186.2 v1(3160.57,1186.2) 3161.25,1186.88 JP23.1@3161.25,1230
  Bottom Layer w10: v1(2550,980) 2570,1000 2787.08,1000 2805.08,982 2805.08,969.92 v1(2825,950)
Vsystem: C25.2 D3.A D4.A JP1.1 JP12.1 TP18.1 U2.10 U2.11 | length 2832.5
  Top Layer w8: 2290.34,1985.99 v1@2290.34,2029.66 ; U2.11@2290.63,1965.99 2290.63,1985.99 2310.31,1985.99 ; U2.10@2310.31,1965.99 2310.31,1985.99 ; 2310.31,2000.31 2310.31,1985.99
  Top Layer w10: JP1.1@1800,1190 1800,1355 1825,1380 v1(2090,1380) ; D4.A@1915,2433.58 1966.48,2382.1 1970.27,2382.1 2000.94,2351.42 D3.A@2010,2351.42 2054.33,2307.09 v1(2054.33,2304.7) ; TP18.1@2100,1595 2100,1585.82 2117.07,1568.75 2177.6,1568.75 ; C25.2@2172.6,1465 2177.6,1470 2177.6,1568.75 ; v1(2290,2030) v1@2290.34,2029.66 ; 2310.31,2000.31 2345,2035 v1(2560,2035) ; JP12.1@2380,1507.5 2380,1563.75 2375,1568.75 ; v1(2560,1570) 2559.38,1569.38 2375.62,1569.38 2375,1568.75 ; 2177.6,1568.75 2375,1568.75
  Bottom Layer w10: v1(2054.33,2304.7) 2205.3,2304.7 2290,2220 v1(2290,2030) ; v1(2090,1380) 2090,1569.14 2092.35,1571.49 2092.35,1587.35 TP18.1@2100,1595 ; v1(2560,1570) v1(2560,2035)
VUSB: C3.2 C4.2 C24.2 FB1.2 JP8.2 JP9.1 R3.1 R5.1 TP1.1 U1.4 U2.13 | length 3494.7
  Top Layer w8: U1.4@1086.85,2465 1086.85,2509.23 ; v1@2140.1,1937.52 U2.13@2242.48,1937.52
  Top Layer w10: FB1.2@867.4,2005 872.2,2000.2 999.8,2000.2 v1(1000,2000) ; 1086.85,2509.23 1095,2517.38 v1(1095,2520) 1115,2540 1375,2540 v1(1405,2510) ; R5.1@1310,2278.46 v1(1310,2330) 1360,2330 1380.89,2309.11 1380.89,2282.57 R3.1@1385,2278.46 1465,2278.46 C24.2@1475,2288.46 ; C24.2@1480,2283.46 C24.2@1475,2278.46 C3.2@1545,2278.46 1545,2280.31 1559.69,2295 v1@1873.48,2295 ; v1(1875,1940) v1(2135,1940) 2137.62,1940 v1@2140.1,1937.52 ; JP9.1@1900,1568.75 JP8.2@1810,1568.75 1810,1662.4 C4.2@1802.4,1670 TP1.1@1945,1670 v1(2135,1670)
  Bottom Layer w10: v1(1000,2000) 1000,2425 v1(1095,2520) ; v1(1310,2330) 1405,2425 v1(1405,2510) ; v1(1873.48,2295.07) 1873.48,1941.52 v1(1875,1940) ; v1(2135,1670) v1(2135,1940)
XIN_32_3: C13.2 U3.29 X1.1 | length 216.3
  Top Layer w10: U3.29@1309.38,1312.8 1405.66,1312.8 C13.2@1415,1303.46 1447.32,1303.46 X1.1@1500,1250.79
XOUT_32_3: C14.2 U3.30 X1.2 | length 196.3
  Top Layer w10: U3.30@1309.38,1360.05 1398.51,1360.05 C14.2@1400,1361.54 1487.68,1361.54 X1.2@1500,1349.21
pads on no net: DN1.8 DN1.9 DN1.12 DS1.3 FD1.0 FD2.0 FD3.0 FD4.0 J1.4 J2.6 J2.8 J3.1 J3.8 J3.MH1 J3.MH2 J4.S1 J4.S2 J15.MH J16.MH J17.MH U1.8 U1.11

## Polygon pours and split planes (outlines as drawn)
3V3 on PowerPlane "3V3_L03_P039" (solid, pour order 39): 660,850 620,850 620,370 835,370 835,595 675,595 665,605
3V3 on PowerPlane "3V3_L03_P016" (solid, pour order 16): 1465,905 1465,100 2425,100 2425,710 2025,710 2025,630 1610,630 1600,630 1595,630 1595,905
5V on PowerPlane "5V_L03_P023" (solid, pour order 23): 3220,750 3480,750 3480,2010 3215,2010
3V3 on PowerPlane "3V3_L03_P017" (solid, pour order 17): 2425,710 3395,710 3395,280 3330,280 3295,315 3330,280 3040,280 3040,585 2425,585
GND on Top Layer "GND_L01_P028" (solid, pour order 28): 20,1745 320,1745 320,635 25,635 20,640
OUT on Top Layer "OUT_L01_P008" (solid, pour order 8): 2075,1360 2075,1090 1990,1090 1990,980 2150,980 2150,1090 2425,1090 2425,1360
Vout on Top Layer "VOUT_L01_P037" (solid, pour order 37): 2755,960 2905,960 2905,1175 3020,1175 3115,1270 3170,1270 3170,1125 3165,1120 3010,1120 3010,655 2905,655 2905,935 2755,935
GND on Top Layer "GND_L01_P038" (solid, pour order 38): 2170,935 2460,935 2535,860 2680,860 2680,985 2745,985 2745,855 2880,855 2880,735 2555,735 2475,815 2170,815
IN on Top Layer "IN_L01_P036" (solid, pour order 36): 2463.67,1072.47 2167.53,1072.47 2165,1075 2165,950 2455,950 2510,895 2670,895 2670,920 2670,930 2535,930 2515,950 2490,975 2490,1040
IN on Top Layer "IN_L01_P010" (solid, pour order 10): 2465,1265 2545,1265 2750,1265 2750,1210 2750,1040 2465,1040
NetL1_1 on Top Layer "NETL1_1_L01_P035" (solid, pour order 35): 1935,1005 1935,1060 1875,1120 1875,1290 1970,1290 1970,1216.48 1950.14,1005
GND on Top Layer "GND_L01_P034" (solid, pour order 34): 1985,970 1982.66,972.34 1877.34,972.34 1835,930 1720,930 1720,830 1729.06,830 1745,830 2155,830 2155,910 2155,970
USB_FTDI_DATA_5_N on Top Layer "USB_FTDI_DATA_5_N" (solid, pour order 33): 1135,2485 1210,2485 1210,2395 1190,2395 1135,2450
USB_FTDI_DATA_5_P on Top Layer "USB_FTDI_DATA_5_P" (solid, pour order 30): 1137.02,2357.95 1137.02,2240 1175,2240 1175,2357.95
Vin on Top Layer "VIN_L01_P011" (solid, pour order 11): 1755,1100 1755,985 1910,985 1910,1140 1755,1140
GND on GroundPlane "GND_L02_P027" (solid, pour order 27): 0,2555 10,2565 3740,2565 3740,10 3745,5 3740,0 0,0

## Keep-outs
Keep-Out Layer:
  lines w7.87: 250,738 5.6,738 0,732.4 0,0 3740,0 3740,2560 10,2560 0,2550 0,1609.74 5.6,1604.14 250,1604.14

## Silkscreen, mask and mechanical layers (free items; w line width, h text height)
Top Overlay:
  drawing of 4 lines, arcs and shapes, not listed
  text "TEAM" at 685,265 h60
  text "04" at 750,155 h60
  text "Co1n1oT" at 605,50 h60
Bottom Overlay:
  drawing of 1408 lines, arcs and shapes, not listed
  text "PCBA S/N" at 3645,2436.9 h60
  text "ESE 5160 / Team Co1n1oT / rev.1.0.0 / Qiming Zhang / Mark Xia" at 3615,2100 h60

## Text inside footprints (layer, text, board x,y; h text height)
FB1: Mechanical 3 "2. SS 102512, ADDED SILKSCREEN." at 857.34,1944.6 h30; Mechanical 3 "HISTORY: 1. MT 090909, UPDATED WITH ASSY & COURTYARD DETAILS. EXTRUDED 3D RE-SIZED BASED ON TDK SMT INDUCTORS." at 1424.81,1379.57 h30; Mechanical 3 "FOOTPRINT WHERE USED: 1. PASSIVE COMPONENTS/EMI FERRITE BEADS AND CHIPS:SMT INDUCTORS" at 1258.36,1543.91 h30
J1: Top Assembly "PCB EDGE" at 614.29,2531.59 h32 r180
J3: Mechanical 2 "Card Inserted" at 3674.41,722.41 h30 r90; Mechanical 2 "Card Ejected" at 3776.37,727.23 h30 r90
R1: Mechanical 3 "SS 102512, ADDED SILKSCREEN." at 1069.31,2105.63 h30 r270
R2: Mechanical 3 "SS 102512, ADDED SILKSCREEN." at 1034.31,2235.63 h30 r270
R3: Mechanical 3 "SS 102512, ADDED SILKSCREEN." at 1326.57,2220.63 h30 r270
R4: Mechanical 3 "SS 102512, ADDED SILKSCREEN." at 2334.31,1285.63 h30 r270
R5: Mechanical 3 "SS 102512, ADDED SILKSCREEN." at 1332.94,2139.26 h30 r270
R6: Mechanical 3 "SS 102512, ADDED SILKSCREEN." at 2019.31,2185.63 h30 r270
R7: Mechanical 3 "SS 102512, ADDED SILKSCREEN." at 2208.74,697.17 h30 r270
R8: Mechanical 3 "SS 102512, ADDED SILKSCREEN." at 658.43,1599.37 h30 r90
R9: Mechanical 3 "SS 102512, ADDED SILKSCREEN." at 546.57,1685.63 h30 r270
R11: Mechanical 3 "SS 102512, ADDED SILKSCREEN." at 1455.63,848.43 h30 r180
R12: Mechanical 3 "SS 102512, ADDED SILKSCREEN." at 1055.63,1753.43 h30 r180
R13: Mechanical 3 "HISTORY: MT 021711, OLDER FOOTPRINT. STANDARD MAX HEIGHT 1.1MM" at 1090.5,1834.74 h30 r90; Mechanical 3 "2. SS 102512, ADDED SILKSCREEN." at 1333.66,1593.59 h30 r90; Mechanical 3 "LOCATION: SURFACEMOUNT2LEAD.PCBLIB" at 1266.83,1653.57 h30 r90
R14: Mechanical 3 "HISTORY: MT 021711, OLDER FOOTPRINT. STANDARD MAX HEIGHT 1.1MM" at 1356.56,1583.49 h30 r90; Mechanical 3 "LOCATION: SURFACEMOUNT2LEAD.PCBLIB" at 1532.89,1402.32 h30 r90; Mechanical 3 "2. SS 102512, ADDED SILKSCREEN." at 1599.72,1342.34 h30 r90
R15: Mechanical 3 "HISTORY: MT 021711, OLDER FOOTPRINT. STANDARD MAX HEIGHT 1.1MM" at 1247.06,1353.99 h30 r90; Mechanical 3 "LOCATION: SURFACEMOUNT2LEAD.PCBLIB" at 1242.21,991.63 h30 r90; Mechanical 3 "2. SS 102512, ADDED SILKSCREEN." at 1249.06,871.68 h30 r90
R18: Mechanical 3 "SS 102512, ADDED SILKSCREEN." at 1899.09,2455.48 h30 r180
R19: Mechanical 3 "SS 102512, ADDED SILKSCREEN." at 2287.28,2142.94 h30
R20: Mechanical 3 "SS 102512, ADDED SILKSCREEN." at 2164.31,2020.63 h30 r270
R21: Mechanical 3 "SS 102512, ADDED SILKSCREEN." at 2043.43,2234.37 h30 r90
U3: Mechanical 2 "Antenna Area / Keep copper out" at -129.76,1127.18 h30 r90